# EAGLE board LEVEL SHIFTER (EAGLE 9.6.2)
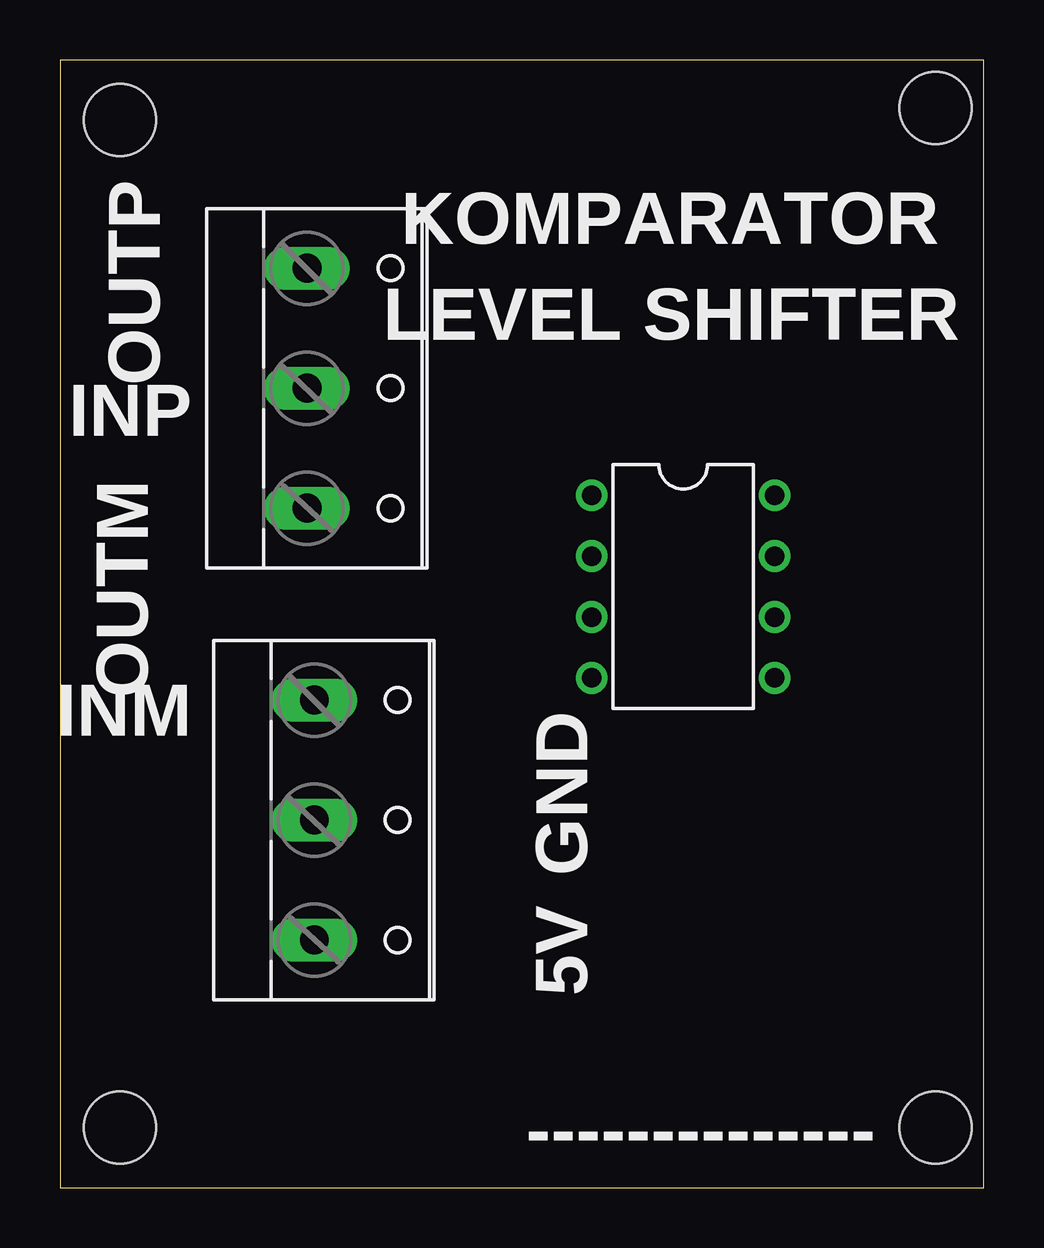
[diagram p0: board, top side]
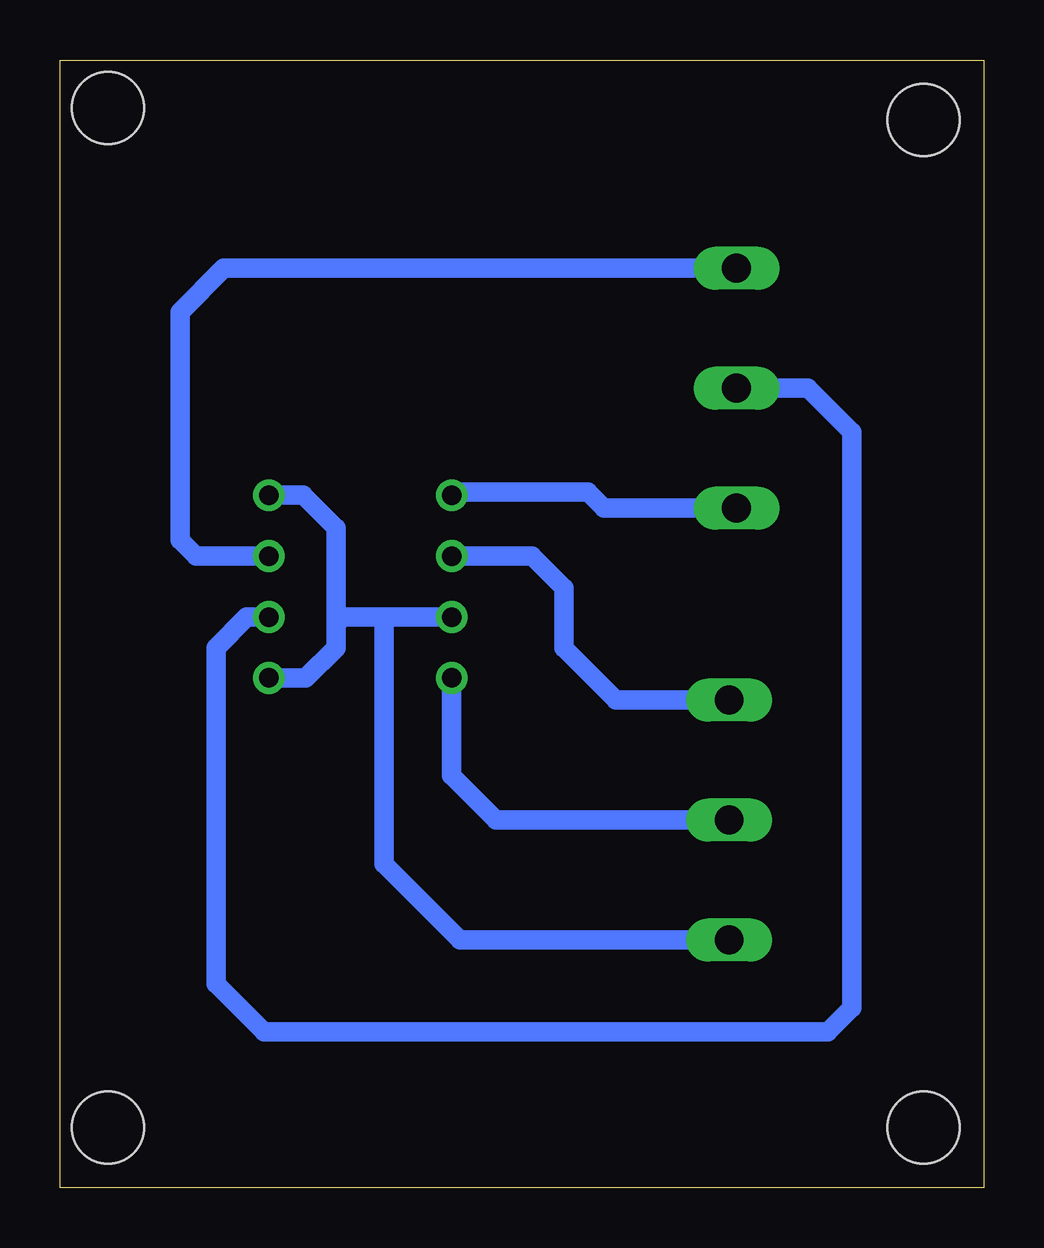
[diagram p1: board, bottom side, seen from below]

Size 38.5 x 47 mm. Coordinates in mm from the lower left corner, seen from the top.
Outline: 0,0 38.5,0 38.5,47 0,47 0,0
Copper layers (1*16): Top 0.035mm / dielectric 1.5mm / Bottom 0.035mm
Design rules "default": minimum track width 6mil, minimum drill 0.35mm, track to track 6mil, track to pad 6mil, pad to pad 6mil, via to via 6mil, smd to smd 6mil, copper to edge 40mil, drill to drill 6mil, minimum pad ring 10mil, minimum via ring 8mil, stop-mask expansion 4mil, vias tented up to drill 0mil, thermal gap 10mil
Holes 3 mm at 2.5,44.5 36.5,45 36.5,2.5 2.5,2.5

## Footprints (pad centres in the part's own frame; a part is rotated, then mirrored left to right if it is on the bottom)
DIL08 = drill 0.813 pad 1.27: 1 -3.81,-3.81; 2 -1.27,-3.81; 3 1.27,-3.81; 4 3.81,-3.81; 5 3.81,3.81; 6 1.27,3.81; 7 -1.27,3.81; 8 -3.81,3.81
W237-103 = drill 1.194 long: 1 -5,-1.29; 2 0,-1.29; 3 5,-1.29

## Placement (x,y rotation side)
IC1  LM358N  [DIL08]  25.98,25.05 270 top
X1  [W237-103]  11.89,15.32 270 top
X2  [W237-103]  11.59,33.32 270 top

## Library data of the parts
IC1 = linear
X1 X2 = con-wago-500; MPN: 237-103; OC_FARNELL: unknown; OC_NEWARK: 18M7116

## Nets
+5V: IC1.3 IC1.5 IC1.8 X1.3
GND: IC1.4 X1.2
N$1: IC1.2 X1.1
N$2: IC1.6 X2.2
N$3: IC1.1 X2.3
N$4: IC1.7 X2.1

## Tracks (layer width: path | path; a pad name or v marks a point on that pad's centre or on a via)
+5V
  Bottom 0.813: IC1.8 28.36,28.86 27,27.5 27,23.5 | 27,23.5 27,22.5 28.26,21.24 IC1.5 | IC1.3 25,23.78 | 25,23.78 26.72,23.78 27,23.5 | X1.3 21.82,10.32 25,13.5 25,23.78
GND
  Bottom 0.813: X1.2 20.32,15.32 22.17,17.17 IC1.4
N$1
  Bottom 0.813: X1.1 15.32,20.32 17.5,22.5 17.5,25 18.82,26.32 IC1.2
N$2
  Bottom 0.813: IC1.6 30.72,23.78 32,22.5 32,8.5 30,6.5 6.5,6.5 5.5,7.5 5.5,31.5 7.32,33.32 X2.2
N$3
  Bottom 0.813: X2.3 15.82,28.32 16.5,29 22.03,29 IC1.1
N$4
  Bottom 0.813: X2.1 31.68,38.32 33.5,36.5 33.5,27 32.82,26.32 IC1.7

## Text on the board
tNames: OUTP | KOMPARATOR | LEVEL SHIFTER | INP | OUTM | INM | GND | 5V | --------------